# Allegro board sub_cam.brd
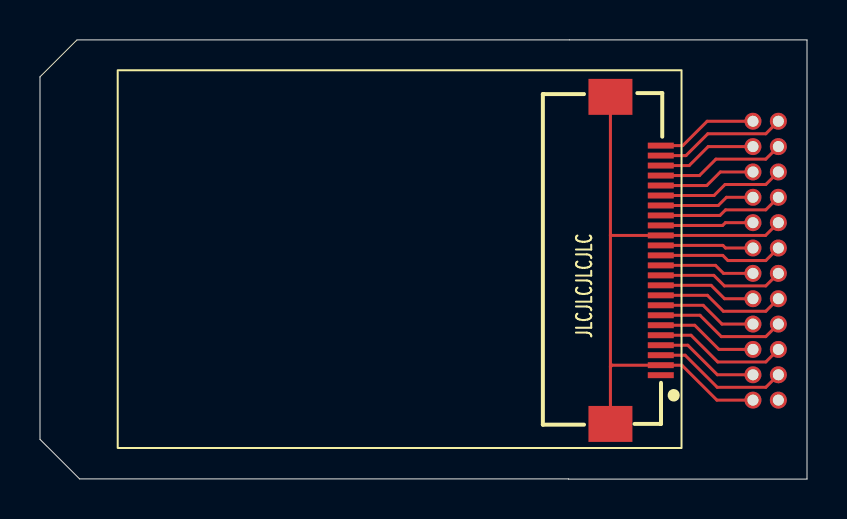
[diagram p0: board, top side]
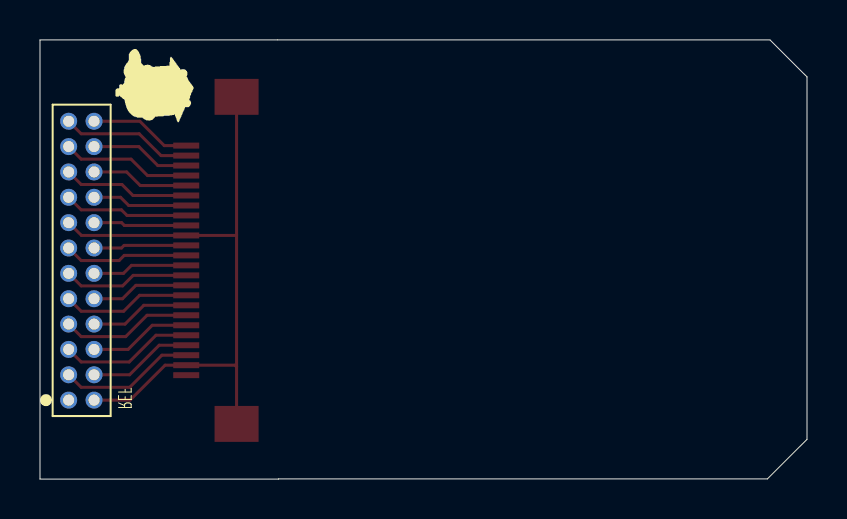
[diagram p1: board, bottom side, seen from below]

Outline 38.35 x 22 mm; copper layers: TOP, BOTTOM. Coordinates in mm from the lower left corner of the outline.
Outline path: 0,20.15 1.85,22 38.35,22 38.35,0 26.44,0 26.43,0.01 1.98,0.01 0,1.99 0,20.15

## Design rules (mm)
constraint set DEFAULT: min track width 0.127
net group PWR: nets GND

## Placement (name value [footprint] x y rotation side)
J102  CON24A  [HDR12X2_1_27MM]  36.92 3.95 90 top
J601  OV2640_MODULE  [FPC_24P]  28.52 10.95 90 top
NOREF  -  []  28.52 2.76 90 top
NOREF#2  -  []  35.13 16.25 90 top

## Library data of the parts
J102 = CON24A
J601 = OV2640_MODULE

## Footprints (pads in the part's own frame, mm; a bottom-side part is the same pattern mirrored in y, then rotated)
FPC_24P
  rect 0.3x1.301 smd: 1(-5.75,-2.518) 2(-5.25,-2.518) 3(-4.75,-2.518) 4(-4.25,-2.518) 5(-3.75,-2.518) 6(-3.25,-2.518) 7(-2.75,-2.518) 8(-2.25,-2.518) 9(-1.75,-2.518) 10(-1.25,-2.518) 11(-0.75,-2.518) 12(-0.25,-2.518) 13(0.25,-2.518) 14(0.75,-2.518) 15(1.25,-2.518) 16(1.75,-2.518) 17(2.25,-2.518) 18(2.75,-2.518) 19(3.25,-2.518) 20(3.75,-2.518) 21(4.25,-2.518) 22(4.75,-2.518) 23(5.25,-2.518) 24(5.75,-2.518)
  rect 1.801x2.2 smd: 25(-8.192,0) 26(8.192,0)
HDR12X2_1_27MM
  round 0.85 hole 0.55: 1(0,0) 2(0,1.27) 3(1.27,0) 4(1.27,1.27) 5(2.54,0) 6(2.54,1.27) 7(3.81,0) 8(3.81,1.27) 9(5.08,0) 10(5.08,1.27) 11(6.35,0) 12(6.35,1.27) 13(7.62,0) 14(7.62,1.27) 15(8.89,0) 16(8.89,1.27) 17(10.16,0) 18(10.16,1.27) 19(11.43,0) 20(11.43,1.27) 21(12.7,0) 22(12.7,1.27) 23(13.97,0) 24(13.97,1.27)

## Nets
GND: J102.2 J102.15 J601.2 J601.15 J601.25 J601.26
CAM_PWDN: J102.8 J601.8
CAM_RESET: J102.6 J601.6
DVP_DATA0: J102.24 J601.24
DVP_DATA1: J102.23 J601.23
DVP_DATA2: J102.19 J601.19
DVP_DATA3: J102.21 J601.21
DVP_DATA4: J102.22 J601.22
DVP_DATA5: J102.20 J601.20
DVP_DATA6: J102.18 J601.18
DVP_DATA7: J102.16 J601.16
DVP_DATA8: J102.14 J601.14
DVP_DATA9: J102.12 J601.12(Y9)
DVP_HREF: J102.9 J601.9
DVP_I2C_SCL: J102.5 J601.5
DVP_I2C_SDA: J102.3 J601.3
DVP_PCLK: J102.17 J601.17
DVP_VSYNC: J102.7 J601.7
DVP_XCLK: J102.13 J601.13
SENSOR_1V2: J102.10 J601.10
SENSOR_2V8: J102.4 J601.4
SENSOR_3V3: J102.11 J601.11

Pads without a net: J102 1; J601 1

## Routing (per net, layer and track width the routed paths; a pad name or vN(x,y) marks a point on that pad's centre or on a via; arc(x,y) is an arc through that point)
GND: length 32.9
  TOP w0.152: 28.52,5.62 28.61,5.7 J601.2 32.1,5.7 33.85,3.95 J102.2 ; 28.52,5.62 J601.25 ; 28.52,5.62 28.52,12.22 ; 28.52,12.22 28.54,12.21 J601.15 36.28,12.21 J102.15 ; 28.52,12.22 J601.26
CAM_PWDN: length 5
  TOP w0.152: J601.8 33.16,8.7 34.1,7.76 J102.8
CAM_RESET: length 5.1
  TOP w0.152: J102.6 33.95,6.49 32.74,7.7 J601.6
DVP_DATA0: length 5.1
  TOP w0.152: J601.24 32.14,16.7 33.36,17.92 J102.24
DVP_DATA1: length 6.6
  TOP w0.152: J102.23 36.29,17.3 33.39,17.3 32.3,16.2 J601.23
DVP_DATA2: length 6.4
  TOP w0.152: J102.19 36.29,14.76 34.26,14.76 33.7,14.21 J601.19
DVP_DATA3: length 6.5
  TOP w0.152: J102.21 36.29,16.03 33.8,16.03 32.98,15.2 J601.21
DVP_DATA4: length 5
  TOP w0.152: J601.22 32.46,15.7 33.41,16.65 J102.22
DVP_DATA5: length 4.9
  TOP w0.152: J102.20 34.02,15.38 33.34,14.7 J601.20
DVP_DATA6: length 4.8
  TOP w0.152: J102.18 34.33,14.11 33.92,13.71 J601.18
DVP_DATA7: length 4.7
  TOP w0.152: J601.16 34.14,12.71 34.27,12.84 J102.16
DVP_DATA8: length 4.7
  TOP w0.152: J102.14 34.28,11.57 34.15,11.71 J601.14
DVP_DATA9: length 4.8
  TOP w0.152: J601.12 33.78,10.7 34.18,10.3 J102.12
DVP_HREF: length 6.5
  TOP w0.152: J102.9 36.29,8.41 34.17,8.41 33.37,9.2 J601.9
DVP_I2C_SCL: length 6.7
  TOP w0.152: J601.5 32.55,7.2 33.89,5.87 36.29,5.87 J102.5
DVP_I2C_SDA: length 6.8
  TOP w0.152: J601.3 32.26,6.2 33.87,4.6 36.29,4.6 J102.3
DVP_PCLK: length 6.3
  TOP w0.152: J102.17 36.29,13.49 34.28,13.49 34,13.21 J601.17
DVP_VSYNC: length 6.6
  TOP w0.152: J102.7 36.29,7.14 34.07,7.14 33,8.2 J601.7
DVP_XCLK: length 6.2
  TOP w0.152: J601.13 34.14,11.21 34.4,10.95 36.29,10.95 J102.13
SENSOR_1V2: length 4.9
  TOP w0.152: J102.10 34.23,9.03 33.56,9.7 J601.10
SENSOR_2V8: length 5.2
  TOP w0.152: J601.4 32.39,6.7 33.87,5.22 J102.4
SENSOR_3V3: length 6.4
  TOP w0.152: J102.11 36.29,9.68 34.22,9.68 33.69,10.2 J601.11

## Text on the board
Ref Des/Silkscreen Top: JLCJLCJLCJLC
NCLEGEND-1-2: FIGURE | FINISHED_SIZE | 21.654 | DRILL CHART: TOP to BOTTOM | ALL UNITS ARE IN MILS | PLATED | QTY | 24
